# Altium PCB 06-光敏传感器模块-电路板图.PcbDoc
Units mm, origin at the board's own origin, x right, y up, seen from the top; angles counter-clockwise.
Board outline 35 x 35 mm, 2 copper layers (Top Layer, Bottom Layer); 13 components, 7 nets, 46 pads, 5 vias.
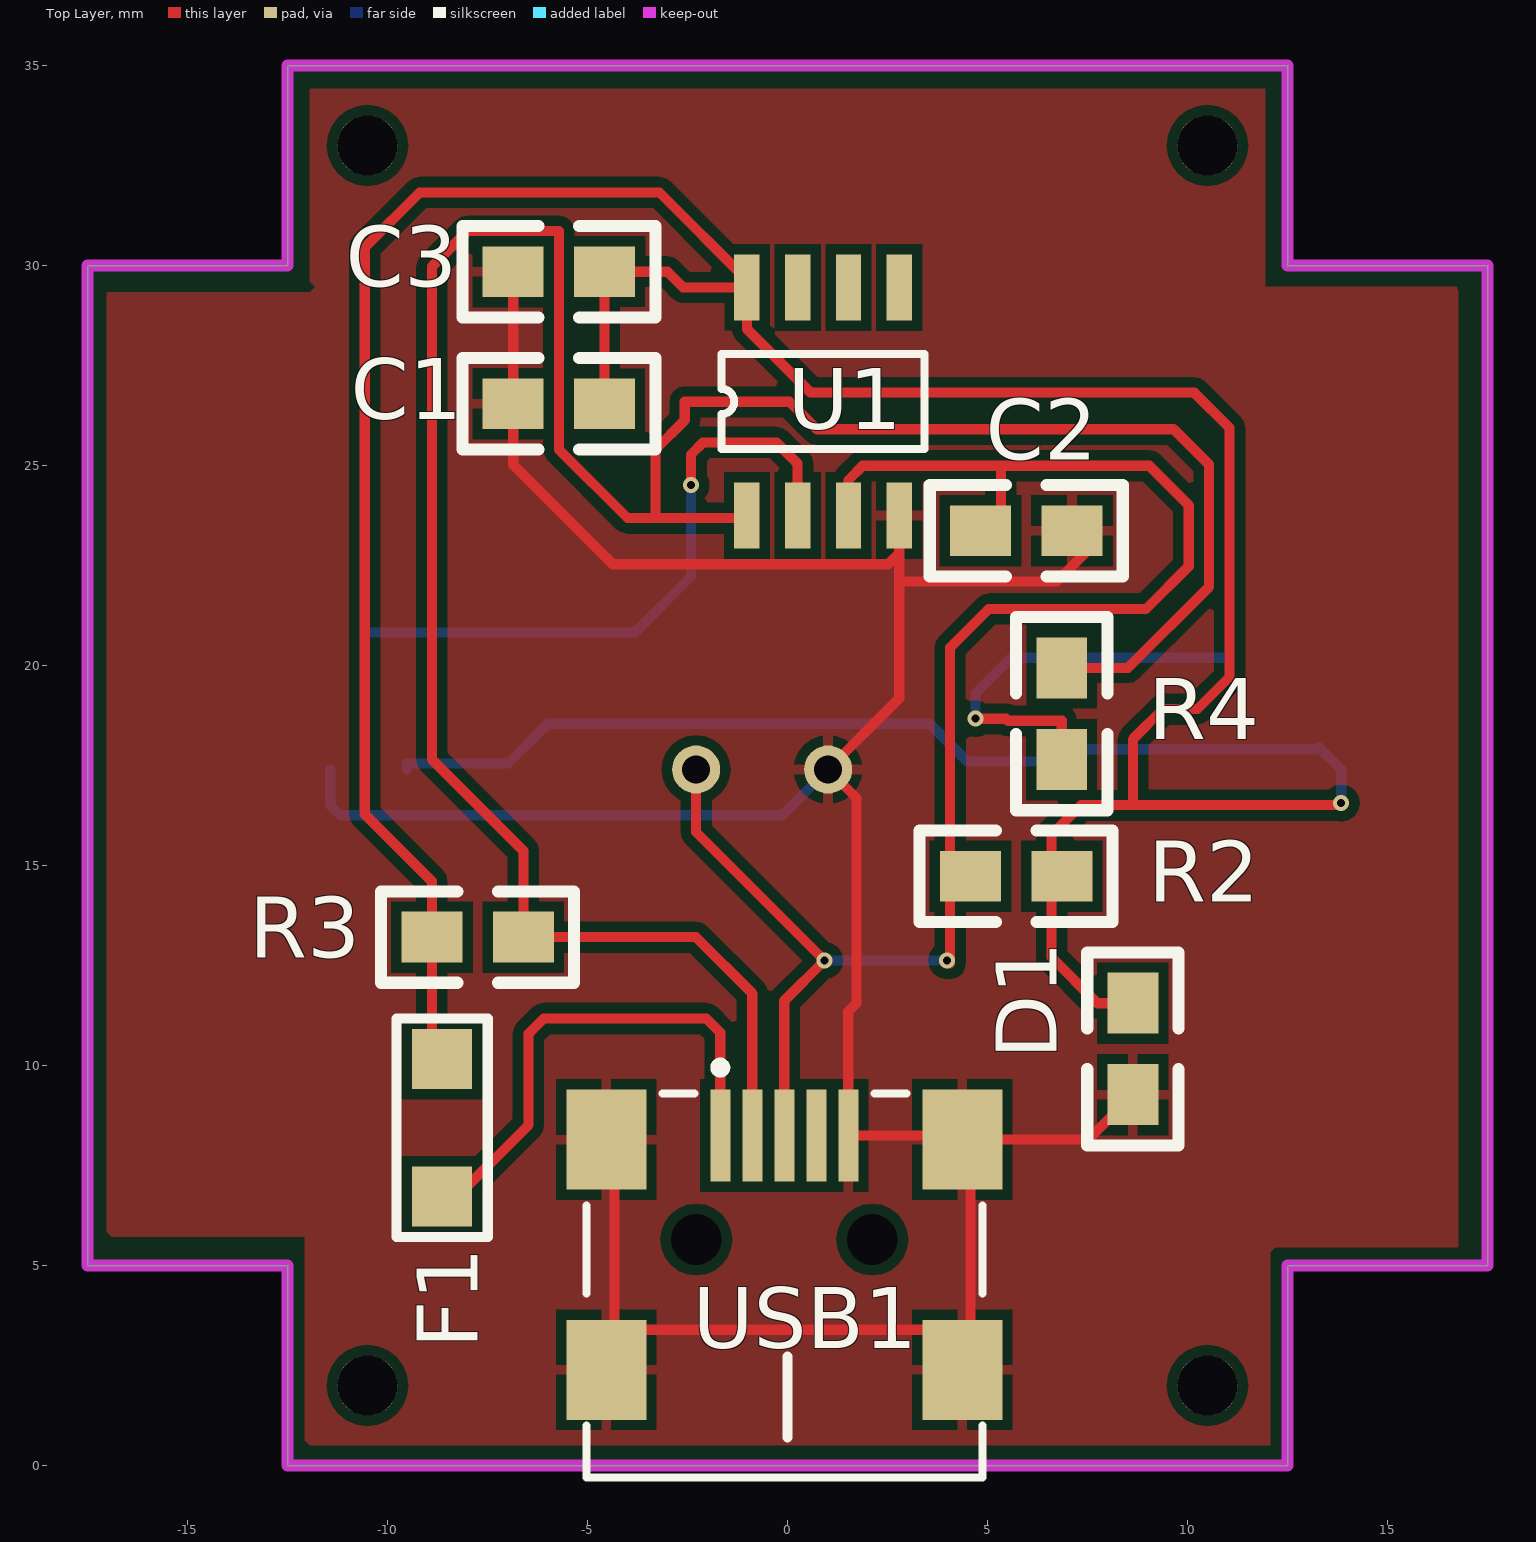
[diagram p0: Top Layer view]
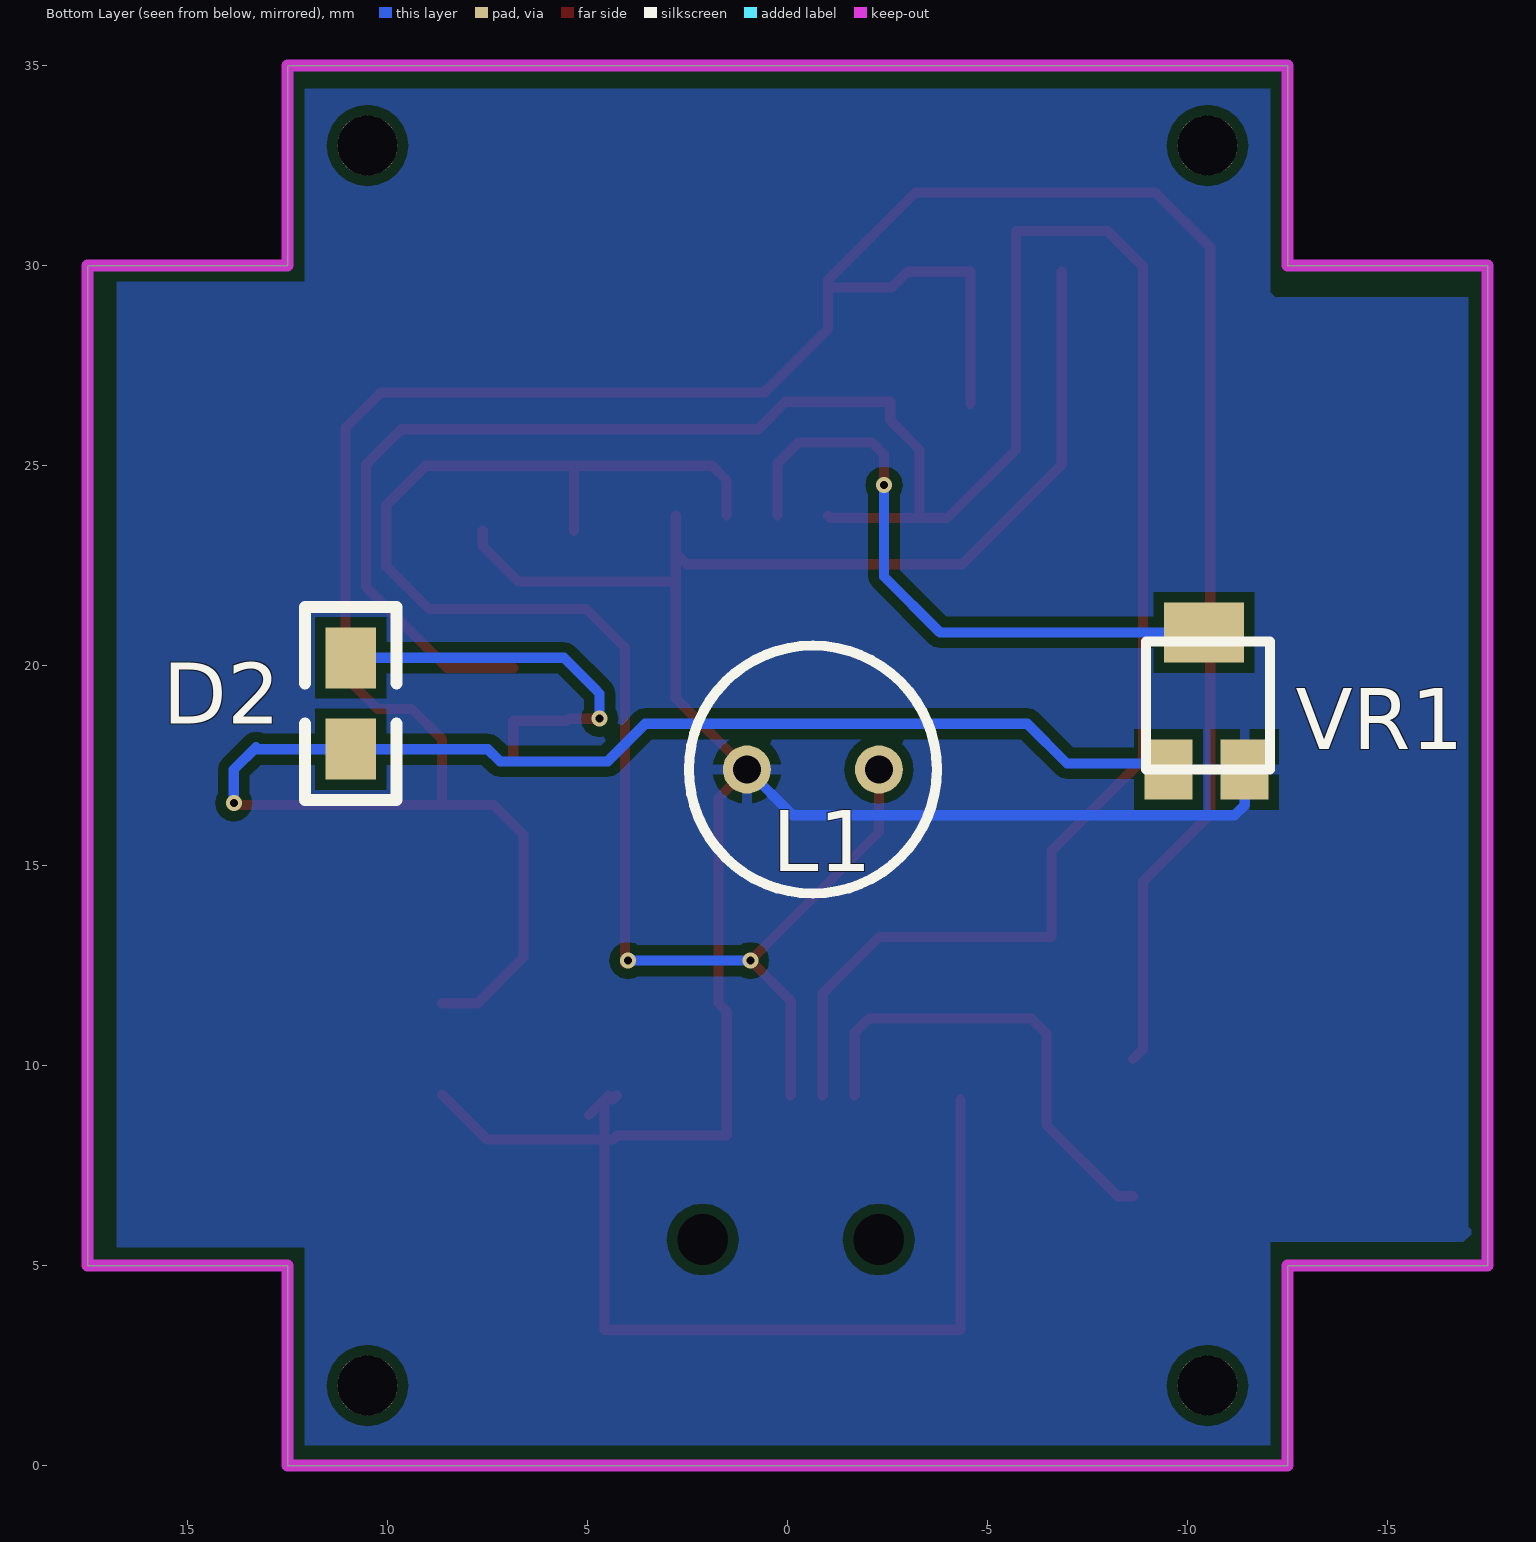
[diagram p1: Bottom Layer view, seen from below]

## Layer stack, top to bottom
Top Layer: signal copper 0.0356
Dielectric: dielectric 0.32, FR-4, Dk 4.8
Bottom Layer: signal copper 0.0356

## Board outline
-17.5,5 -12.5,5 -12.5,0 12.5,0 12.5,5 17.5,5 17.5,30 12.5,30 12.5,35 -12.5,35 -12.5,30 -17.5,30

## Design rules (kind name [scope] priority, off if disabled: settings)
Clearance [All] p1: gap=0.254
PolygonConnect [All] p1: connectstyle=Relief reliefconductorwidth=0.254 reliefentries=4 polygonreliefangle="90 Angle"
RoutingVias [All] p1: holewidth=1.5 width=1.5 viastyle="Through Hole" minholewidth=1.5 minwidth=1.5 maxholewidth=1.5 maxwidth=1.5
SilkscreenOverComponentPads [All] p1: minsilkscreentomaskgap=0.254
SolderMaskExpansion [All] p1: expansion=0.102
TestPointUsage FabricationTestPointUsage [All] p1: valid=0 allowmultiple=FALSE
Testpoint FabricationTestpoint [All] p1: side=3 testpointundercomponent=TRUE minsize=1.016 maxsize=2.54 preferedsize=1.524 minholesize=0 maxholesize=1.016 preferedholesize=0.813 testpointgrid=0.025 style=297 order=0123456789
Width OTHER [All] p1: maxlimit=0.254 minlimit=0.254 preferedwidth=0.254
Width VCC [InNet('VCC')] p2: maxlimit=0.4 minlimit=0.4 preferedwidth=0.4
Width GND [InNet('GND')] p3: maxlimit=0.4 minlimit=0.4 preferedwidth=0.4
23 further rules are at their usual default settings.

## Classes and differential pairs
component class 原理图: C1 C2 D1 D2 F1 L1 R2 R3 R4 U1 USB1 VR1

## Components (designator, comment, footprint, x,y, rotation, side; value= is the part's Value field where it differs from the comment)
C1 "Cap Semi" 0805 -6.858,26.543 r0 top
C2 "Cap Semi" 0805 7.112,23.368 r180 top
C3 "Cap Semi" 0805 -6.858,29.845 r0 top (schematic designator C1)
D1 "LED0" 0805 8.636,11.557 r270 top
D2 "LED0" 0805 10.922,17.907 r90 bottom
F1 "Fuse 1" Fuse -8.636,10.16 r270 top
L1 "light_resistor" light -2.286,17.399 r0 bottom
R2 "Res2" 0805 4.572,14.732 r0 top
R3 "Res2" 0805 -6.604,13.208 r180 top
R4 "Res2" 0805 6.858,19.939 r270 top
U1 "LM393" SOP-8 -1.016,23.749 r90 top
USB1 "USB" USB/SM0.8-6H5 0.046,4.715 r270 top (schematic designator USB_1)
VR1 "Res Tap" VR -10.414,18.415 r90 bottom

## Footprints (in the part's own frame and the unit in brackets; to place one, negate y for a bottom-side part, rotate by r counter-clockwise, add the part's x,y. Pads: shape width x height; smd on the part's side, far side on the other; paste and mask are expansions set on the pad)
0805 [mil]
  rect 60x50 smd: 1(0,-0.06) 2(90,-0.06)
  silkscreen extent -50,-45 140,45
Fuse [mm]
  rect 1.5x1.5 smd: 1(0,0) 2(3.429,0)
  silkscreen extent -1.02,-1.14 4.45,1.14
light [mm]
  round 1.2 hole 0.7: 1(0,0) 2(3.3,0)
  silkscreen extent -1.45,-3.1 4.75,3.1
SOP-8 [mil]
  rect 65x25 smd: 1(0,0) 2(0,-50) 3(0,-100) 4(0,-150) 5(224.41,-150) 6(224.41,-100) 7(224.41,-50) 8(224.41,0)
  silkscreen extent 65,-175 159,25
USB/SM0.8-6H5 [mm]
  rect 2.3x0.5 smd: 1(-3.532,-1.727) 2(-3.532,-0.927) 3(-3.532,-0.127) 4(-3.532,0.673) 5(-3.532,1.473)
  rect 2.5x2 smd: 6(-3.432,4.323) 7(2.322,4.323) 8(-3.432,-4.577) 9(2.322,-4.577)
  round 0.6 hole 1.27 unplated: MH1(-0.932,2.073) MH2(-0.932,-2.327)
  silkscreen extent -5.36,-5.08 5.02,4.82
VR [mm]
  rect 1.5x1.2 smd: 1(-1.016,0.889) 2(-1.016,-1.016)
  rect 1.5x2 smd: 3(2.413,0)
  silkscreen extent -1.02,-1.65 2.18,1.45

## Part data
C1 C2 C3: "Capacitor (Semiconductor SIM Model)"
D1 D2: "Typical INFRARED GaAs LED"
F1: "Fuse"
L1: library part light
R2 R3 R4: "Resistor"
USB1: library part USB5
VR1: "Tapped Resistor"

## Free pads (board coordinates)
  round 1.5 hole 1.5: 0(-10.5,2) 0(-10.5,33) 0(10.5,2) 0(10.5,33)

## Via types
v1: diameter 0.4, hole 0.2, Top Layer to Bottom Layer, 5 vias

## Nets (pads, with @x,y where several pads share a name; then routed paths per layer and width w, separated by ;. In a path a pad name is that pad's centre, name@x,y a point inside that pad or via, vN(x,y) a via of type N, cw(c..) or ccw(c..) an arc to the next point about the centre after c; other vN are vias at no path point)
A+: C2.2 L1.1 R2.1 U1.3 USB1.3 | length 41.4
  Top Layer w0.254: L1.1 -2.286,15.837 v1(0.927,12.624) -0.081,11.616 USB1.3@-0.081,9.247 ; U1.3 1.524,24.638 1.88,24.994 5.994,24.994 ; v1@4.064,12.548 4.064,20.447 5.029,21.412 8.965,21.412 10.033,22.481 10.033,24.003 9.042,24.994 5.334,24.994 C2.2@5.334,23.37
  Bottom Layer w0.254: v1(0.927,12.624) v1(3.988,12.624)
GND: C1.1 C2.1 C3.1 D1.2 L1.2 U1.4 USB1.5 USB1.6 USB1.7 USB1.8 USB1.9 VR1.2 | length 80.6
  Top Layer w0.254: C3.1 C1.1 -6.858,25.016 -4.371,22.53 2.512,22.53 2.794,22.812 ; USB1.8@-4.323,9.147 -4.323,3.393 4.577,3.393 USB1.6@4.577,9.147 ; U1.4 2.794,23.343 2.794,22.812 ; USB1.6@4.269,9.247 USB1.6@4.369,9.147 ; USB1.6@4.477,9.247 USB1.6@4.577,9.147 ; USB1.6@4.959,8.765 USB1.6@4.577,9.147 ; C2.1@7.62,23.37 7.62,22.987 6.731,22.098 2.794,22.098 ; D1.2 7.51,8.147 USB1.6 4.269,8.247 USB1.5 1.519,9.247 1.519,11.349 1.727,11.557 1.727,16.686 L1.2 2.794,19.179 2.794,22.098 ; 2.794,22.098 2.794,22.812
  Bottom Layer w0.254: VR1.2 -11.43,16.51 -11.176,16.256 -0.129,16.256 L1.2
NetC1_2: C1.2 C3.2 D1.1 D2.1 F1.1 R2.2 R3.2 U1.8 VR1.1 | length 103.9
  Top Layer w0.254: F1.1 -8.89,10.414 R3.2 -8.89,14.605 -10.569,16.284 -10.569,30.455 -9.197,31.826 -3.2,31.826 -1.016,29.642 U1.8 ; C1.2 C3.2 -3,29.843 -2.605,29.449 U1.8 ; D1.1 7.747,11.557 6.604,12.7 R2.2@6.604,14.353 ; 8.636,16.51 8.636,18.133 ; 8.647,18.172 9.387,18.912 10.248,18.912 11.049,19.713 11.049,25.944 10.171,26.822 0.582,26.822 -1.016,28.42 U1.8 ; v1@13.843,16.51 7.846,16.51 7.338,16.51 6.604,15.776 R2.2@6.604,15.268 ; R2.2@6.604,14.353 R2.2@6.604,15.268 ; R2.2@6.604,14.353 R2.2@6.604,15.268
  Bottom Layer w0.254: VR1.1 -9.525,17.551 -6.988,17.551 -5.997,18.542 3.554,18.542 4.494,17.602 7.186,17.602 7.49,17.907 D2.1 13.284,17.907 ; 13.284,17.958 13.843,17.399 v1(13.843,16.561)
NetD2_2: D2.2 R4.2 | length 10.3
  Top Layer w0.254: v1(4.699,18.669) 5.458,18.669 5.509,18.618 6.856,18.618 R4.2
  Bottom Layer w0.254: 4.699,19.304 v1(4.699,18.669) v1@4.7,18.67 ; 4.761,19.366 5.588,20.193 D2.2
NetU1_2: U1.2 VR1.3 | length 15.9
  Top Layer w0.254: v1(-2.413,24.511) -2.413,25.273 -2.108,25.578 -0.282,25.578 0.254,25.042 U1.2
  Bottom Layer w0.254: VR1.3 -3.81,20.828 -2.413,22.225 v1@-2.413,24.488
OUTA: R3.1 R4.1 U1.1 USB1.2 | length 65.6
  Top Layer w0.254: -8.004,30.858 -8.89,29.972 -8.89,17.653 -6.604,15.367 R3.1 -2.288,13.21 -0.881,11.803 USB1.2@-0.881,9.247 ; -8.001,30.861 -5.715,30.861 -5.715,25.4 -4,23.686 -3.302,23.686 ; U1.1 -1.079,23.686 -3.302,23.686 ; R4.1 8.509,19.939 10.541,21.971 10.541,25.021 9.654,25.908 0.734,25.908 0.048,26.594 -2.568,26.594 -2.568,26.134 -3.302,25.4 -3.302,23.686
VCC: F1.2 USB1.1 | length 11.9
  Top Layer w0.254: F1.2 -8.255,6.731 -6.477,8.509 -6.477,10.795 -6.096,11.176 -2.032,11.176 -1.681,10.825 USB1.1@-1.681,9.247
pads on no net: U1.5 U1.6 U1.7 USB1.4 USB1.MH1 USB1.MH2

## Polygon pours and split planes (outlines as drawn)
GND on Top Layer "Top Layer-No Net" (solid): -17.018,29.337 -11.938,29.337 -11.811,29.464 -11.938,29.591 -11.938,34.417 11.938,34.417 11.938,29.464 16.891,29.464 16.764,29.337 16.764,5.461 12.192,5.461 12.065,5.334 12.065,0.508 -11.938,0.508 -12.065,0.635 -12.065,5.715 -16.891,5.715 -17.018,5.842 -17.018,29.337
GND on Bottom Layer "Top Layer-No Net" (solid): -17.018,29.21 -12.192,29.21 -12.065,29.337 -12.065,34.417 12.065,34.417 12.065,29.591 16.764,29.591 16.764,5.461 12.065,5.461 12.065,0.508 -12.065,0.508 -12.065,5.588 -16.891,5.588 -17.145,5.842 -17.018,5.969 -17.018,29.21

## Keep-outs
Keep-Out Layer:
  the board outline again, w0.3

## Silkscreen, mask and mechanical layers (free items; w line width, h text height)
Top Overlay:
  lines w0.254: 0,0.697 0,2.729

## Dimensions
-12.5,35 to -12.5,0 on Mechanical 1
-17.5,5 to 17.5,5 on Mechanical 1